# Altium PCB lab1_sokolov_usb_i2c.PcbDoc
Units mm, origin at the board's own origin, x right, y up, seen from the top; angles counter-clockwise.
Board outline 54.9 x 19.9 mm, 4 copper layers (Top Layer, Signal Layer 1, Signal Layer 2, Bottom Layer), stack 1.522 mm thick; 44 components, 30 nets, 163 pads, 4 vias.
Unrouted connection lines stored in the file: 99.
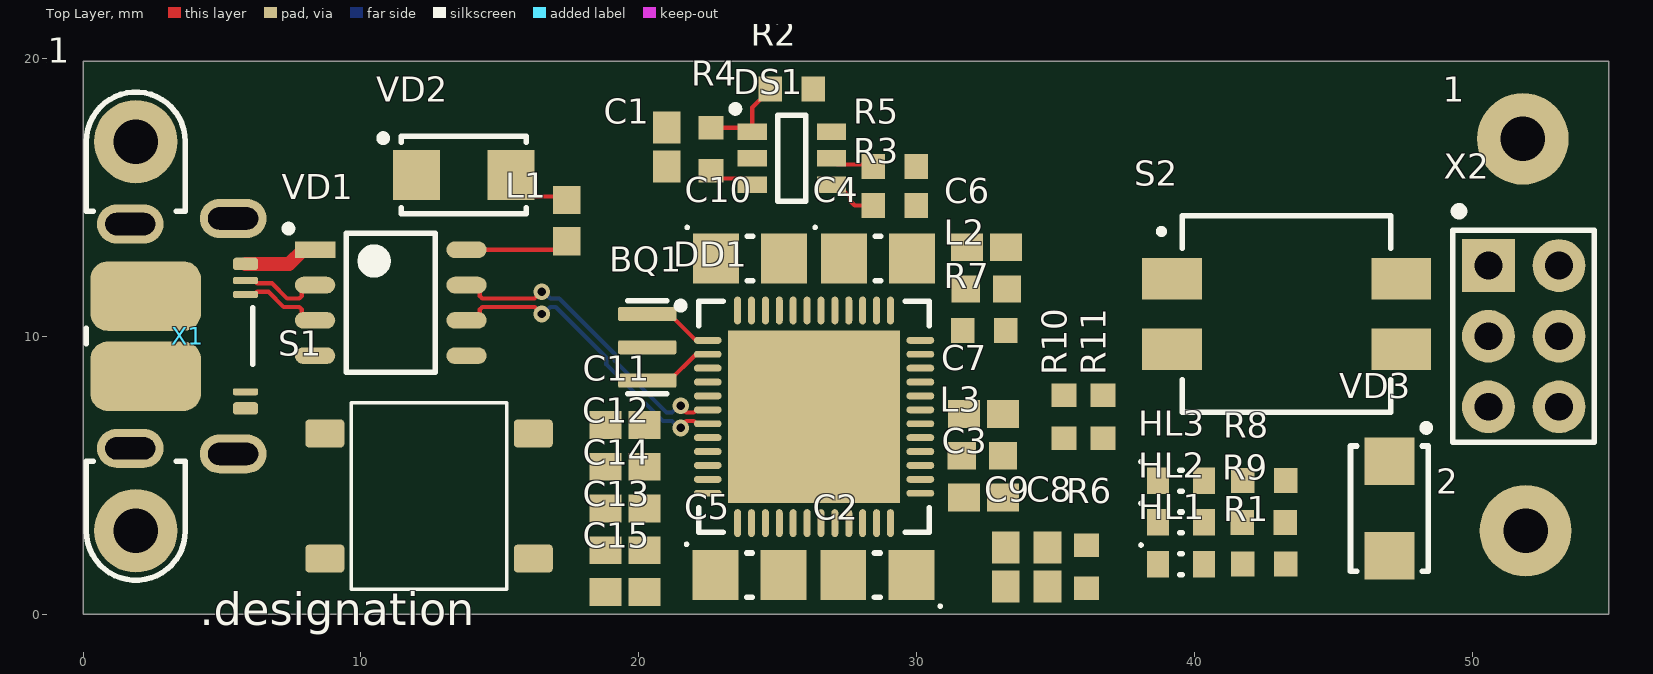
[diagram p0: Top Layer view]
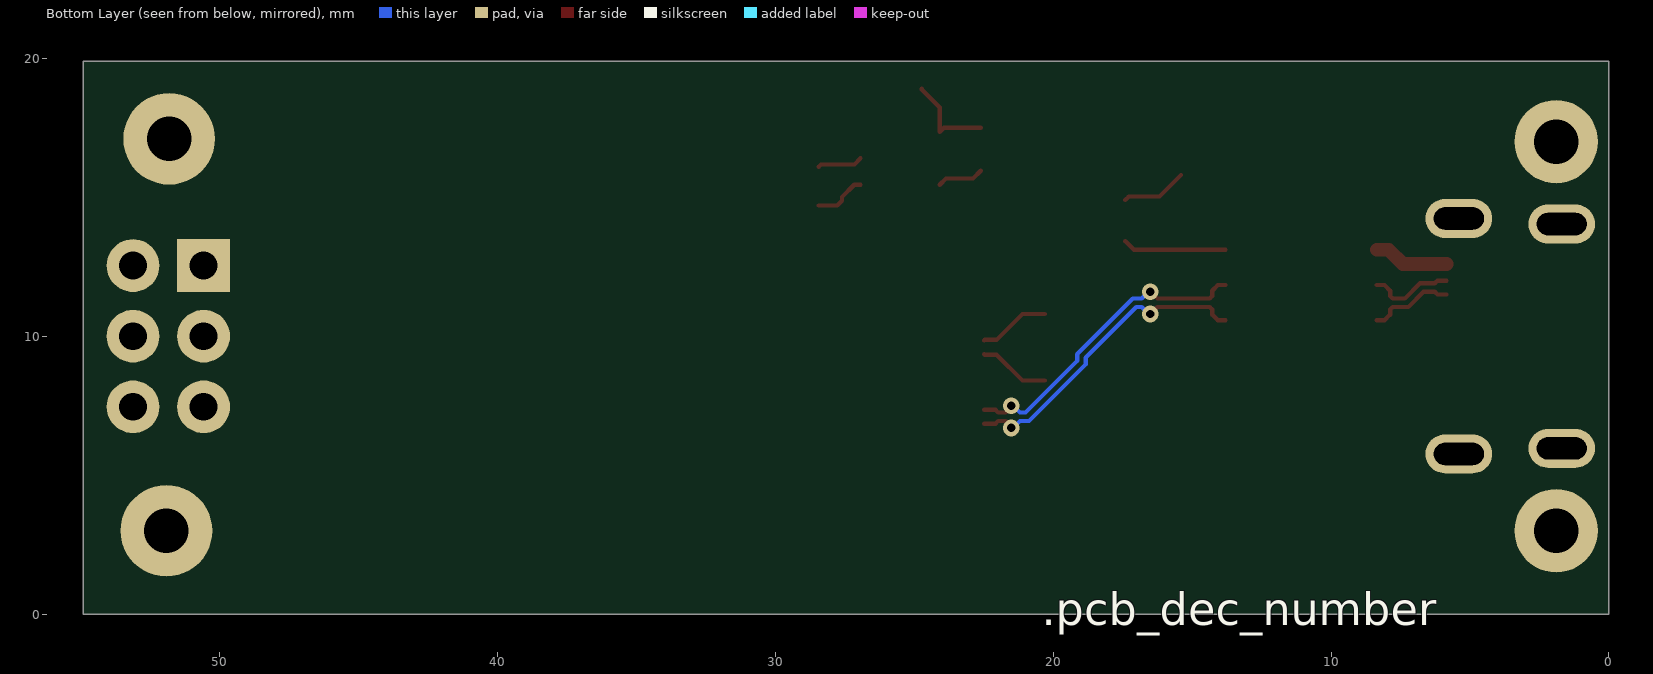
[diagram p1: Bottom Layer view, seen from below]

## Layer stack, top to bottom
Top Solder: solder mask 0.0102, Solder Resist, Dk 3.5
Top Layer: signal copper 0.018
Prepreg 1: prepreg 0.125, FR4 HiTg170, Dk 5.07
Signal Layer 1: signal copper 0.018
Core 1: core 1.2, FR4, Dk 4.6
Signal Layer 2: signal copper 0.018
Prepreg 2: prepreg 0.125, FR4 HiTg170, Dk 5.07
Bottom Layer: signal copper 0.018
Bottom Solder: solder mask 0.0102, Solder Resist, Dk 3.5

## Board outline
0,0 54.9,0 54.9,19.9 0,19.9

## Design rules (kind name [scope] priority, off if disabled: settings)
AcuteAngle min_acute_angle [OnCopper] p1: minimum=3.50000000000000E+0001 checktracksonly=FALSE // Минимальный угол между примитивами топологии
BoardOutlineClearance board_outline_clearance_std [NOT (OnLayer('Bottom Overlay') OR OnLayer('Top Overlay'))] p1: gap=0.25 ignorepadtopadclearanceinfootprint=FALSE except(0: Arc-SplitContinuation Track-SplitContinuation SMDPad-SplitContinuation THPad-SplitContinuation Via-SplitContinuation Fill-SplitContinuation Poly-SplitContinuation Region-SplitContinuation Text-SplitContinuation) // Отступ элементов топологии от края фрезеруемой печатной платы
Clearance clearance_outer_18um_std [OnTopLayer OR OnBottomLayer] p1: gap=0.125 ignorepadtopadclearanceinfootprint=TRUE except(0.2: Arc-Fill Arc-Poly Track-Fill Track-Poly SMDPad-SMDPad SMDPad-Fill SMDPad-Poly THPad-Fill THPad-Poly Via-Fill Via-Poly Fill-Fill Fill-Poly Poly-Poly Poly-Region Poly-Text; 0.25: Arc-Hole Track-Hole SMDPad-Hole THPad-Hole Via-Hole Fill-Hole Poly-Hole Region-Hole Text-Hole) // Зазоры на внешних слоях
Clearance clearance_inner_18um_std [NOT (OnTopLayer Or OnBottomLayer)] p2: gap=0.125 ignorepadtopadclearanceinfootprint=FALSE except(0.2: Arc-Fill Arc-Poly Track-Fill Track-Poly SMDPad-SMDPad SMDPad-Fill SMDPad-Poly THPad-Fill THPad-Poly Via-Fill Via-Poly Fill-Fill Fill-Poly Poly-Poly Poly-Region Poly-Text; 0.25: Arc-Hole Track-Hole SMDPad-Hole THPad-Hole Via-Hole Fill-Hole Poly-Hole Region-Hole Text-Hole) // Зазоры на внутренних слоях
ComponentClearance [All] p1: gap=0 collisioncheckmode=3 verticalgap=0 showdistances=FALSE
DiffPairsRouting "Schematic Differential Pairs Routing_3" [InNet('D_N')] p1: maxlimit=0.254 minlimit=0.15 mostfreqgap=0.254 toplayer_maxgap=0.15 toplayer_prefgap=0.15 toplayer_minwidth=0.155 toplayer_maxwidth=0.155 toplayer_prefwidth=0.155 bottomlayer_maxgap=0.15 bottomlayer_prefgap=0.15 bottomlayer_minwidth=0.155 bottomlayer_maxwidth=0.155 bottomlayer_prefwidth=0.155 impedanceprofiledriven=TRUE impedanceprofileid={1B1F1868-2FFB-4D51-908A-913D90CA9AFC} impedanceprofilevalue=95.000000 maxuncoupledlength=12.7
DiffPairsRouting "Schematic Differential Pairs Routing_2" [InNet('D_P')] p2: maxlimit=0.254 minlimit=0.15 mostfreqgap=0.254 toplayer_maxgap=0.15 toplayer_prefgap=0.15 toplayer_minwidth=0.155 toplayer_maxwidth=0.155 toplayer_prefwidth=0.155 bottomlayer_maxgap=0.15 bottomlayer_prefgap=0.15 bottomlayer_minwidth=0.155 bottomlayer_maxwidth=0.155 bottomlayer_prefwidth=0.155 impedanceprofiledriven=TRUE impedanceprofileid={1B1F1868-2FFB-4D51-908A-913D90CA9AFC} impedanceprofilevalue=95.000000 maxuncoupledlength=12.7
DiffPairsRouting "Schematic Differential Pairs Routing_1" [InNet('USB_D_N')] p3: maxlimit=0.254 minlimit=0.15 mostfreqgap=0.254 toplayer_maxgap=0.15 toplayer_prefgap=0.15 toplayer_minwidth=0.155 toplayer_maxwidth=0.155 toplayer_prefwidth=0.155 bottomlayer_maxgap=0.15 bottomlayer_prefgap=0.15 bottomlayer_minwidth=0.155 bottomlayer_maxwidth=0.155 bottomlayer_prefwidth=0.155 impedanceprofiledriven=TRUE impedanceprofileid={1B1F1868-2FFB-4D51-908A-913D90CA9AFC} impedanceprofilevalue=95.000000 maxuncoupledlength=12.7
DiffPairsRouting "Schematic Differential Pairs Routing" [InNet('USB_D_P')] p4: maxlimit=0.254 minlimit=0.15 mostfreqgap=0.254 toplayer_maxgap=0.15 toplayer_prefgap=0.15 toplayer_minwidth=0.155 toplayer_maxwidth=0.155 toplayer_prefwidth=0.155 bottomlayer_maxgap=0.15 bottomlayer_prefgap=0.15 bottomlayer_minwidth=0.155 bottomlayer_maxwidth=0.155 bottomlayer_prefwidth=0.155 impedanceprofiledriven=TRUE impedanceprofileid={1B1F1868-2FFB-4D51-908A-913D90CA9AFC} impedanceprofilevalue=95.000000 maxuncoupledlength=12.7
DiffPairsRouting diff_pairs_routing [All] p5: maxlimit=0.254 minlimit=0.127 mostfreqgap=0.254 toplayer_maxgap=0.127 toplayer_prefgap=0.127 toplayer_minwidth=0.143 toplayer_maxwidth=0.143 toplayer_prefwidth=0.143 midlayer1_minwidth=0.381 midlayer1_maxwidth=0.381 midlayer1_prefwidth=0.381 midlayer2_minwidth=0.381 midlayer2_maxwidth=0.381 midlayer2_prefwidth=0.381 bottomlayer_maxgap=0.127 bottomlayer_prefgap=0.127 bottomlayer_minwidth=0.143 bottomlayer_maxwidth=0.143 bottomlayer_prefwidth=0.143 impedanceprofiledriven=TRUE impedanceprofileid={FD46899E-B5A2-4EF5-A302-5D2DB6A51F35} maxuncoupledlength=12.7 // Правила трассировки дифференциальных пар
HoleSize min_hole_size_std [IsPad] p1: absolutevalues=TRUE maxlimit=5.9 minlimit=0.6 maxpercent=80.000 minpercent=20.000 // Диаметр межслойного переходного отверстия
HoleSize min_hole_size_via_std [IsVia] p2: absolutevalues=TRUE maxlimit=5.9 minlimit=0.3 maxpercent=80.000 minpercent=20.000 // Минимальный диаметр монтажного отверстия
HoleToHoleClearance hole_to_hole_clearance_std [All] p1: gap=0.2 allowstackedmicrovias=FALSE // Минимальное расстояние между краями двух отверстий
MinimumAnnularRing min_via_ar_std [All] p1: minimumring=0.15 // Поясок площадки переходного отверстия (Annular ring VIA)
MinimumAnnularRing min_pad_ar_std [All] p2: minimumring=0.2 // Поясок монтажной контактной площадки (Annular ring PAD)
MinimumSolderMaskSliver min_solder_mask_bridge_std [All] p1: minsoldermaskwidth=0.15 // Мнимальная ширина масочного мостика
PlaneClearance plane_clearance_18um_std [All] p1: clearance=0.2 // Отступ полигона (для слоя plane) от элементов топологии
PlaneConnect [All] p1: planeconnectstyle=Relief reliefexpansion=0.5 reliefentries=4 reliefconductorwidth=0.2 reliefairgap=0.2
PolygonConnect poly_connect_to_pad<=0.3 [(AsMM(PadXSize_AllLayers)<=0.301) or (AsMM(PadYSize_AllLayers)<=0.301)] p1: thpad.connectstyle=Relief thpad.reliefconductorwidth=0.2 thpad.reliefentries=4 thpad.polygonreliefangle="90 Angle" thpad.airgapwidth=0.2 smdpad.connectstyle=Relief smdpad.reliefconductorwidth=0.2 smdpad.reliefentries=4 smdpad.polygonreliefangle="90 Angle" smdpad.airgapwidth=0.2 via.connectstyle=Direct via.reliefconductorwidth=0.254 via.reliefentries=4 via.polygonreliefangle="90 Angle" via.airgapwidth=0.254 // Правила подключения полигонов для падов от 0,3мм и меньше
PolygonConnect poly_connect_to_pad<=0.4 [(AsMM(PadXSize_AllLayers)<=0.401) or (AsMM(PadYSize_AllLayers)<=0.401)] p2: thpad.connectstyle=Relief thpad.reliefconductorwidth=0.26 thpad.reliefentries=4 thpad.polygonreliefangle="90 Angle" thpad.airgapwidth=0.2 smdpad.connectstyle=Relief smdpad.reliefconductorwidth=0.26 smdpad.reliefentries=4 smdpad.polygonreliefangle="90 Angle" smdpad.airgapwidth=0.2 via.connectstyle=Direct via.reliefconductorwidth=0.254 via.reliefentries=4 via.polygonreliefangle="90 Angle" via.airgapwidth=0.254 // Правила подключения полигонов для падов от 0,4 и меньше
PolygonConnect poly_connect_to_pad<=0.6 [(AsMM(PadXSize_AllLayers)<=0.601) or (AsMM(PadYSize_AllLayers)<=0.601)] p3: thpad.connectstyle=Relief thpad.reliefconductorwidth=0.33 thpad.reliefentries=4 thpad.polygonreliefangle="90 Angle" thpad.airgapwidth=0.2 smdpad.connectstyle=Relief smdpad.reliefconductorwidth=0.33 smdpad.reliefentries=4 smdpad.polygonreliefangle="90 Angle" smdpad.airgapwidth=0.2 via.connectstyle=Direct via.reliefconductorwidth=0.254 via.reliefentries=4 via.polygonreliefangle="90 Angle" via.airgapwidth=0.254 // Правила подключения полигонов для падов от 0,6мм и меньше
PolygonConnect poly_connect_to_pad<=0.7 [(AsMM(PadXSize_AllLayers)<=0.701) or (AsMM(PadYSize_AllLayers)<=0.701)] p4: thpad.connectstyle=Relief thpad.reliefconductorwidth=0.46 thpad.reliefentries=4 thpad.polygonreliefangle="90 Angle" thpad.airgapwidth=0.2 smdpad.connectstyle=Relief smdpad.reliefconductorwidth=0.46 smdpad.reliefentries=4 smdpad.polygonreliefangle="90 Angle" smdpad.airgapwidth=0.2 via.connectstyle=Direct via.reliefconductorwidth=0.254 via.reliefentries=4 via.polygonreliefangle="90 Angle" via.airgapwidth=0.254 // Правила подключения полигонов для падов от 0,7мм и меньше
PolygonConnect poly_connect_to_pad<=0.8 [(AsMM(PadXSize_AllLayers)<=0.8)or(AsMM(PadYSize_AllLayers)<=0.8)] p5: thpad.connectstyle=Relief thpad.reliefconductorwidth=0.53 thpad.reliefentries=4 thpad.polygonreliefangle="90 Angle" thpad.airgapwidth=0.3 smdpad.connectstyle=Relief smdpad.reliefconductorwidth=0.53 smdpad.reliefentries=4 smdpad.polygonreliefangle="90 Angle" smdpad.airgapwidth=0.2 via.connectstyle=Direct via.reliefconductorwidth=0.254 via.reliefentries=4 via.polygonreliefangle="90 Angle" via.airgapwidth=0.254 // Правила подключения полигонов для падов от 0,8мм и меньше
PolygonConnect poly_connect_to_pad<=1 [(AsMM(PadXSize_AllLayers)<=1.01)or(AsMM(PadYSize_AllLayers)<=1.01)] p6: thpad.connectstyle=Relief thpad.reliefconductorwidth=0.6 thpad.reliefentries=4 thpad.polygonreliefangle="90 Angle" thpad.airgapwidth=0.3 smdpad.connectstyle=Relief smdpad.reliefconductorwidth=0.6 smdpad.reliefentries=4 smdpad.polygonreliefangle="90 Angle" smdpad.airgapwidth=0.2 via.connectstyle=Direct via.reliefconductorwidth=0.254 via.reliefentries=4 via.polygonreliefangle="90 Angle" via.airgapwidth=0.254 // Правила подключения полигонов для падов от 1мм и меньше
PolygonConnect poly_connect_to_pad<=1.3 [(AsMM(PadXSize_AllLayers)<=1.31)or(AsMM(PadYSize_AllLayers)<=1.31)] p7: thpad.connectstyle=Relief thpad.reliefconductorwidth=0.66 thpad.reliefentries=4 thpad.polygonreliefangle="90 Angle" thpad.airgapwidth=0.3 smdpad.connectstyle=Relief smdpad.reliefconductorwidth=0.86 smdpad.reliefentries=4 smdpad.polygonreliefangle="90 Angle" smdpad.airgapwidth=0.2 via.connectstyle=Direct via.reliefconductorwidth=0.254 via.reliefentries=4 via.polygonreliefangle="90 Angle" via.airgapwidth=0.254 // Правила подключения полигонов для падов от 1,3мм и меньше
PolygonConnect poly_connect_to_pad<=1.6 [(AsMM(PadXSize_AllLayers)<=1.61)or(AsMM(PadYSize_AllLayers)<=1.61)] p8: thpad.connectstyle=Relief thpad.reliefconductorwidth=0.8 thpad.reliefentries=4 thpad.polygonreliefangle="90 Angle" thpad.airgapwidth=0.3 smdpad.connectstyle=Relief smdpad.reliefconductorwidth=1 smdpad.reliefentries=4 smdpad.polygonreliefangle="90 Angle" smdpad.airgapwidth=0.2 via.connectstyle=Direct via.reliefconductorwidth=0.254 via.reliefentries=4 via.polygonreliefangle="90 Angle" via.airgapwidth=0.254 // Правила подключения полигонов для падов от 1,6мм и меньше
PolygonConnect poly_connect_to_pad<=1.8 [(AsMM(PadXSize_AllLayers)<=1.8)or(AsMM(PadYSize_AllLayers)<=1.8)] p9: thpad.connectstyle=Relief thpad.reliefconductorwidth=1 thpad.reliefentries=4 thpad.polygonreliefangle="90 Angle" thpad.airgapwidth=0.3 smdpad.connectstyle=Relief smdpad.reliefconductorwidth=1.2 smdpad.reliefentries=4 smdpad.polygonreliefangle="90 Angle" smdpad.airgapwidth=0.2 via.connectstyle=Direct via.reliefconductorwidth=0.254 via.reliefentries=4 via.polygonreliefangle="90 Angle" via.airgapwidth=0.254 // Правила подключения полигонов для падов от 1,8мм и меньше
PolygonConnect poly_connect_to_pad<=2 [(AsMM(PadXSize_AllLayers)<=2.01)or(AsMM(PadYSize_AllLayers)<=2.01)] p10: thpad.connectstyle=Relief thpad.reliefconductorwidth=1.1 thpad.reliefentries=4 thpad.polygonreliefangle="90 Angle" thpad.airgapwidth=0.3 smdpad.connectstyle=Relief smdpad.reliefconductorwidth=1.4 smdpad.reliefentries=4 smdpad.polygonreliefangle="90 Angle" smdpad.airgapwidth=0.2 via.connectstyle=Direct via.reliefconductorwidth=0.254 via.reliefentries=4 via.polygonreliefangle="90 Angle" via.airgapwidth=0.254 // Правила подключения полигонов для падов от 2мм и меньше
PolygonConnect poly_connect_to_pad<=2.3 [(AsMM(PadXSize_AllLayers)<=2.31)or(AsMM(PadYSize_AllLayers)<=2.31)] p11: thpad.connectstyle=Relief thpad.reliefconductorwidth=1.2 thpad.reliefentries=4 thpad.polygonreliefangle="90 Angle" thpad.airgapwidth=0.3 smdpad.connectstyle=Relief smdpad.reliefconductorwidth=1.4 smdpad.reliefentries=4 smdpad.polygonreliefangle="90 Angle" smdpad.airgapwidth=0.2 via.connectstyle=Direct via.reliefconductorwidth=0.254 via.reliefentries=4 via.polygonreliefangle="90 Angle" via.airgapwidth=0.254 // Правила подключения полигонов для падов от 2,3мм и меньше
PolygonConnect poly_connect_to_pad<=2.5 [(AsMM(PadXSize_AllLayers)<=2.51)or(AsMM(PadYSize_AllLayers)<=2.51)] p12: thpad.connectstyle=Relief thpad.reliefconductorwidth=1.2 thpad.reliefentries=4 thpad.polygonreliefangle="90 Angle" thpad.airgapwidth=0.3 smdpad.connectstyle=Relief smdpad.reliefconductorwidth=1.4 smdpad.reliefentries=4 smdpad.polygonreliefangle="90 Angle" smdpad.airgapwidth=0.2 via.connectstyle=Direct via.reliefconductorwidth=0.254 via.reliefentries=4 via.polygonreliefangle="90 Angle" via.airgapwidth=0.254 // Правила подключения полигонов для падов от 2,5мм и меньше
PolygonConnect poly_connect_to_pad<=2.7 [(AsMM(PadXSize_AllLayers)<=2.71)or(AsMM(PadYSize_AllLayers)<=2.71)] p13: thpad.connectstyle=Relief thpad.reliefconductorwidth=1.4 thpad.reliefentries=4 thpad.polygonreliefangle="90 Angle" thpad.airgapwidth=0.3 smdpad.connectstyle=Relief smdpad.reliefconductorwidth=1.6 smdpad.reliefentries=4 smdpad.polygonreliefangle="90 Angle" smdpad.airgapwidth=0.2 via.connectstyle=Direct via.reliefconductorwidth=0.254 via.reliefentries=4 via.polygonreliefangle="90 Angle" via.airgapwidth=0.254 // Правила подключения полигонов для падов от 2,7мм и меньше
PolygonConnect poly_connect_to_pad<=3 [(AsMM(PadXSize_AllLayers)<=3.01)or(AsMM(PadYSize_AllLayers)<=3.01)] p14: thpad.connectstyle=Relief thpad.reliefconductorwidth=1.6 thpad.reliefentries=4 thpad.polygonreliefangle="90 Angle" thpad.airgapwidth=0.3 smdpad.connectstyle=Relief smdpad.reliefconductorwidth=1.8 smdpad.reliefentries=4 smdpad.polygonreliefangle="90 Angle" smdpad.airgapwidth=0.2 via.connectstyle=Direct via.reliefconductorwidth=0.254 via.reliefentries=4 via.polygonreliefangle="90 Angle" via.airgapwidth=0.254 // Правила подключения полигонов для падов от 3мм и меньше
PolygonConnect poly_connect_to_pad<=7 [(AsMM(PadXSize_AllLayers)<7.01)or(AsMM(PadYSize_AllLayers)<=7.01)] p15: thpad.connectstyle=Relief thpad.reliefconductorwidth=2 thpad.reliefentries=4 thpad.polygonreliefangle="90 Angle" thpad.airgapwidth=0.4 smdpad.connectstyle=Relief smdpad.reliefconductorwidth=2 smdpad.reliefentries=4 smdpad.polygonreliefangle="90 Angle" smdpad.airgapwidth=0.3 via.connectstyle=Direct via.reliefconductorwidth=0.254 via.reliefentries=4 via.polygonreliefangle="90 Angle" via.airgapwidth=0.254 // Правила подключения полигонов для падов от 7мм и меньше
PolygonConnect poly_connect_to_pad [All] p16: thpad.connectstyle=Relief thpad.reliefconductorwidth=0.25 thpad.reliefentries=4 thpad.polygonreliefangle="90 Angle" thpad.airgapwidth=0.2 smdpad.connectstyle=Relief smdpad.reliefconductorwidth=0.25 smdpad.reliefentries=4 smdpad.polygonreliefangle="90 Angle" smdpad.airgapwidth=0.2 via.connectstyle=Direct via.reliefconductorwidth=0.25 via.reliefentries=4 via.polygonreliefangle="90 Angle" via.airgapwidth=0.2 // Правила подключения полигонов общие
RoutingCorners [All] p1 off: cornerstyle=45-Degree minsetback=2.5 maxsetback=2.5
RoutingVias [All] p1: holewidth=0.3 width=0.6 viastyle="Through Hole" minholewidth=0.3 minwidth=0.6 maxholewidth=5.9 maxwidth=6.4
SilkToSilkClearance silk_to_silk_clearance_std [All] p1 off: silktosilkclearance=0.15 // Отступ текста шелкографии от других примитивов шелкографии
SilkToSolderMaskClearance silk_to_solder_mask_clearance_std [IsPad] p1 off: minsilkscreentomaskgap=0.15 clearancetoexposedcopper=FALSE // Минимальное расстояние между элементами шелкографии и вскрытой медью
SolderMaskExpansion solder_mask_expansion_std [All] p1: expansion=0.05 // Припуск паяльной масски
UnRoutedNet [All] p1: checkbadconnections=TRUE
Width width_18um_std [All] p1: maxlimit=10 minlimit=0.125 preferedwidth=0.15 checkconnectedcopper=TRUE // Ширина проводников (общая)
19 further rules are at their usual default settings.

## Classes and differential pairs
differential pair class USB_NETS_CLASS: D USB_D
differential pair USB_D: +USB_D_P -USB_D_N
differential pair D: +D_P -D_N

## Components (designator, comment, footprint, x,y, rotation, side; value= is the part's Value field where it differs from the comment)
1 "MOUNTING_HOLE" HOLE_1,6X3,3 51.8,17.1 r90 top
2 "MOUNTING_HOLE" HOLE_1,6X3,3 51.9,3 r90 top
BQ1 "CSTCE12M0G52A-R0" CSTCE-3-320X130X70 20.3,9.6 r180 top
C1 "0,1 мк" C0603 21,16.8 r270 top
C2 "4,7 мк" C1206POLAR 28.575,1.4 r180 top
C3 "0,1 мк" C0603 32.4,4.2 r180 top
C4 "4,7 мк" C1206POLAR 28.6,12.8 r0 top
C5 "4,7 мк" C1206POLAR 23.975,1.4 r0 top
C6 "0,1 мк" C0603 32.5,13.2 r0 top
C7 "0,1 мк" C0603 32.4,7.2 r180 top
C8 "0,1 мк" C0603 34.7,1.7 r270 top
C9 "0,1 мк" C0603 33.2,1.7 r270 top
C10 "4,7 мк" C1206POLAR 24,12.8 r0 top
C11 "0,1 мк" C0603 19.5,6.8 r180 top
C12 "0,1 мк" C0603 19.5,5.3 r180 top
C13 "0,1 мк" C0603 19.5,2.3 r180 top
C14 "0,1 мк" C0603 19.5,3.8 r180 top
C15 "0,1 мк" C0603 19.5,0.8 r180 top
DD1 "FT232HQ" QFN-48 26.3,7.1 r0 top
DS1 "93LC56BT-I/OT" SOT23-6 25.5,16.4 r0 top
HL1 "TLMB1100-GS08" HL0603 39.5,1.8 r0 top
HL2 "TLMB1100-GS08" HL0603 39.5,3.3 r0 top
HL3 "TLMB1100-GS08" HL0603 39.5,4.8 r0 top
L1 "BLM18KG221SH1D" BLM-2-0603 17.4,14.16 r270 top
L2 "BLM18KG221SH1D" BLM-2-0603 32.5,11.7 r0 top
L3 "BLM18KG221SH1D" BLM-2-0603 32.36,5.7 r180 top
R1 "220" R0603 42.5,1.8 r180 top
R2 "10 к" R0603 25.5,18.9 r180 top
R3 "10 к" R0603 29.2,14.7 r180 top
R4 "2 к" R0603 22.6,16.725 r270 top
R5 "10 к" R0603 29.2,16.1 r180 top
R6 "12 К" R0603 36.1,1.7 r90 top
R7 "10 к" R0603 32.425,10.2 r180 top
R8 "10 к" R0603 42.5,4.8 r0 top
R9 "10 к" R0603 42.475,3.3 r0 top
R10 "10 к" R0603 35.3,7.1 r270 top
R11 "10 к" R0603 36.7,7.1 r270 top
S1 "KLS7-TS6604-5.0-180-B" KLS7-TS6604_500 12.45,4.25 r180 top
S2 "SDA02H1SBD" DIP-SWITCH-02-706X930X545 43.3,10.8 r0 top
VD1 "USB6B1" SO-8 11.075,11.205 r0 top
VD2 "SL13-E3/5AT" DO-214AC 13.7,15.8 r0 top
VD3 "SL13-E3/5AT" DO-214AC 47,3.8 r270 top
X1 "2108877-1" 2108877-1 2.15,10 r90 top
X2 "DS1021-2*3SF11" DS1021-2X3SF11 51.83,10 r270 top

## Footprints (in the part's own frame and the unit in brackets; to place one, negate y for a bottom-side part, rotate by r counter-clockwise, add the part's x,y. Pads: shape width x height; smd on the part's side, far side on the other; paste and mask are expansions set on the pad)
2108877-1 [mm]
  rrect50% 0.45x0.9 smd: 1(2.6,-3.696) 5(-2.6,-3.696)
  rrect50% 0.25x0.9 smd: 2(2,-3.696) 3(1.5,-3.696) 4(-2,-3.696)
  round 3 hole 1.6: TP1(-7,0.25) TP1(7,0.25)
  oval 1.4x2.4 hole 0.8 slot 1.8 at 90 deg mask+0.102: TP1(-4.235,-3.25) TP1(-4.035,0.45) TP1(4.035,0.45) TP1(4.235,-3.25)
  rrect50% 2.5x3.98 smd: TP1(-1.441,-0.104) TP1(1.441,-0.104)
  silkscreen extent -8.78,-3.95 8.78,2.03, body extent -8.9,-3.95 8.9,3.95, height 3.39
BLM-2-0603 [mm] "Chip Inductor, 2-Leads, Body 1,60x0,80mm, IPC Medium Density"
  rect 1.02x0.98 smd: 1(-0.74,0) 2(0.74,0)
  body extent -0.8,-0.37 0.8,0.38, height 0.8
C0603 [mm] "Chip Capacitor, 2-Leads, Body 1,60x0,80mm, IPC Medium Density"
  rect 1.15x1 smd: 1(-0.7,0) 2(0.7,0)
  body extent -0.8,-0.4 0.8,0.4, height 0.8
C1206POLAR [mm] "Chip Capacitor, 2-Leads, Body 3,20x1,60mm, IPC Medium Density"
  rect 1.65x1.8 smd: 1(-1.225,0) 2(1.225,0)
  silkscreen extent -2.31,-0.8 0.1,1.16, body extent -1.73,-0.8 1.73,0.8, height 1.65
CSTCE-3-320X130X70 [mm]
  rrect25% 2.1x0.5 smd paste-0.025 mask+0.1: 1(0,1.2) 2(0,0) 3(0,-1.2)
  silkscreen extent -0.7,-1.67 0.7,1.68, body extent -0.7,-1.68 0.7,1.67, height 0.75
DIP-SWITCH-02-706X930X545 [mm]
  rect 2.15x1.5 smd: 1(-4.125,-1.27) 2(4.125,-1.27) 3(-4.125,1.27) 4(4.125,1.27)
  silkscreen extent -4.6,-3.53 3.74,3.53, body extent -4.65,-3.53 4.65,3.53, height 5.44
DO-214AC [mm] "Molded Diode, 2-Leads, Body 4,25x2,67mm, IPC Medium Density"
  rect 1.7x1.8 smd: 1(-1.7,0) 2(1.7,0)
  silkscreen extent -3.02,-1.4 2.25,1.45, body extent -2.7,-1.81 2.7,1.81, height 2.43
DS1021-2X3SF11 [mm]
  rect 1.9x1.9 hole 1: 1(-2.54,-1.27)
  round 1.9 hole 1: 2(-2.54,1.27) 3(0,-1.27)
  round 1.9 hole 1 mask+0.102: 4(0,1.27) 5(2.54,-1.27) 6(2.54,1.27)
  silkscreen extent -4.5,-2.55 3.81,2.54, body extent -3.81,-2.54 3.81,2.54, height 8.59
HL0603 [mm] "Chip Diode, 2-Leads, Body 1,60x0,80mm, IPC Medium Density"
  rect 0.8x0.95 smd: 1(-0.825,0) 2(0.825,0)
  silkscreen extent -1.49,-0.38 0.05,0.74, body extent -0.81,-0.4 0.81,0.4, height 0.6
HOLE_1,6X3,3 [mm]
  round 3.3 hole 1.6: 1(0,0)
KLS7-TS6604_500 [mm] "6.5x6.5mm SMD tact switch 5mm stem"
  rrect25% 1.4x1 smd: 1(-3.75,2.25) 1(3.75,2.25) 2(-3.75,-2.25) 2(3.75,-2.25)
  silkscreen extent -2.79,-3.35 2.79,3.35, body extent -4,-3.25 4,3.25, height 4.3
QFN-48 [mm] "QFN, 48-Leads, Body 8,00x8,00mm, Pitch 0,50mm, Thermal Pad 6,20x6,20mm, IPC Medium Density"
  rect 6.2x6.2 smd: 0(0,0)
  oval 1x0.25 smd: 1(-3.825,2.75) 2(-3.825,2.25) 3(-3.825,1.75) 4(-3.825,1.25) 5(-3.825,0.75) 6(-3.825,0.25) 7(-3.825,-0.25) 8(-3.825,-0.75) 9(-3.825,-1.25) 10(-3.825,-1.75) 11(-3.825,-2.25) 12(-3.825,-2.75) 25(3.825,-2.75) 26(3.825,-2.25) 27(3.825,-1.75) 28(3.825,-1.25) 29(3.825,-0.75) 30(3.825,-0.25) 31(3.825,0.25) 32(3.825,0.75) 33(3.825,1.25) 34(3.825,1.75) 35(3.825,2.25) 36(3.825,2.75)
  oval 0.25x1 smd: 13(-2.75,-3.825) 14(-2.25,-3.825) 15(-1.75,-3.825) 16(-1.25,-3.825) 17(-0.75,-3.825) 18(-0.25,-3.825) 19(0.25,-3.825) 20(0.75,-3.825) 21(1.25,-3.825) 22(1.75,-3.825) 23(2.25,-3.825) 24(2.75,-3.825) 37(2.75,3.825) 38(2.25,3.825) 39(1.75,3.825) 40(1.25,3.825) 41(0.75,3.825) 42(0.25,3.825) 43(-0.25,3.825) 44(-0.75,3.825) 45(-1.25,3.825) 46(-1.75,3.825) 47(-2.25,3.825) 48(-2.75,3.825)
  silkscreen extent -4.92,-4.15 4.15,4.15, body extent -4,-4 4,4, height 0.85
R0603 [mm] "Chip Resistor, 2-Leads, Body 1,60x0,80mm, IPC Medium Density"
  rect 0.85x0.9 smd: 1(-0.775,0) 2(0.775,0)
  body extent -0.8,-0.4 0.8,0.4, height 0.45
SO-8 [mm] "SOIC, 8-Leads, Body 4,90x3,90mm, Pitch 1,27mm, IPC Medium Density"
  rect 1.45x0.6 smd: 1(-2.725,1.905)
  oval 1.45x0.6 smd: 2(-2.725,0.635) 3(-2.725,-0.635) 4(-2.725,-1.905) 5(2.725,-1.905) 6(2.725,-0.635) 7(2.725,0.635) 8(2.725,1.905)
  silkscreen extent -3.81,-2.5 1.6,2.79, body extent -3.06,-2.47 3.06,2.48, height 1.75
SOT23-6 [mm] "SOT23, 6-Leads, Body 2,90x2,70mm, Pitch 0,95mm, IPC Medium Density"
  rect 1.05x0.6 smd: 1(-1.425,0.95) 2(-1.425,0) 3(-1.425,-0.95) 4(1.425,-0.95) 5(1.425,0) 6(1.425,0.95)
  silkscreen extent -2.16,-1.55 0.5,1.9, body extent -0.9,-1.55 0.9,1.55, height 1.45

## Part data
BQ1: library part q0001, "=Описание", HelpURL=https://www.murata.com/en-us/products/productdetail?partno=CSTCE12M0G52A-R0, id=q0001, Корпус=3,2x1,3x0,7, Наименование=CSTCE12M0G52A-R0, Описание="Кварцевый резонатор 12 МГц", Производитель="Murata Manufacturing Co., Ltd.", Фамилия=Самарин, Частота="12 МГц"
C1 C3 C6 C7 C8 C9 C11 C12 C13 C14 C15: library part c0005, "=Описание", HelpURL=https://www.yageo.com/upload/media/product/products/datasheet/mlcc/UPY-GPHC_X7R_6.3V-to-50V_20.pdf, id=c0005, Корпус=0603, Наименование=CC0603JRX7R9BB104, Номинал="0,1 мк", Номинальное напряжение="50 В", Описание="Конденсатор чип 0603 0,1 мкФ 50 В ±5 %", Отклонение="±5 %", Производитель=Yageo, Рабочие температуры="от -55 °С до +125 °С", Фамилия=Ларионов
C2 C4 C5 C10: library part c0012, "=Описание", HelpURL=https://ru.mouser.com/datasheet/2/427/tr3-1763391.pdf, id=c0012, Корпус=1206, Наименование=TR3A475K010C1000, Номинал="4,7 мк", Номинальное напряжение="10 В", Описание="Конденсатор чип 1206 4,7 мкФ 10 В ±10 % полярный", Отклонение="±10 %", Производитель="Vishay Intertechnology, Inc.", Рабочие температуры="от -55 °С до +85 °С", Фамилия=Соколов
DD1: library part dd0008, "=Описание", HelpURL=https://www.ftdichip.com/Products/ICs/FT232H.htm, id=dd0008, Корпус=QFN-48, Наименование=FT232HQ, Описание="Преобразователь USB-I2C", Производитель="FTDI Ltd.", Фамилия=Соколов
DS1: library part ds0001, "=Описание", HelpURL=https://www.microchip.com/wwwproducts/en/93LC56B, id=ds0001, Корпус=SOT23-6, Наименование=93LC56BT-I/OT, Описание="EEPROM 2 Кб 3 линии", Производитель="Microchip Technology Inc.", Фамилия=Соколов
HL1 HL2 HL3: library part hl0006, "=Описание", HelpURL=https://www.vishay.com/leds/list/product-83173/, id=hl0006, Корпус=0603, Наименование=TLMB1100-GS08, Номинальная длина волны="466 нм", Номинальная сила света="5 мкд", Номинальное падение напряжения="3,9 В", Номинальный прямой ток="30 мА", Описание="Светодиод чип 0603 синий", Примечание="Not for new design", Производитель="Vishay Intertechnology, Inc.", Рабочие температуры="от -40 °С до +100 °С", Рассеиваемая мощность="90 мВт", Фамилия=Ларионов, Цвет=Blue
L1 L2 L3: library part l0001, "=Описание", HelpURL=https://www.murata.com/en-global/products/productdetail.aspx?partno=BLM18KG221SH1%23, id=l0001, Корпус=0603, Наименование=BLM18KG221SH1D, Описание="Ферритовая бусина 220 Ом ±25 %", Отклонение, 100 Мгц="±25 %", Производитель="Murata Manufacturing Co., Ltd.", Рабочие температуры="от -55 °С до +125 °С", Сопротивление, 100 МГц="220 Ом", Сопротивление при постоянном токе="0,05 Ом", Фамилия=Ларионов
R1: library part r0008, "=Описание", HelpURL=https://www.yageo.com/upload/media/product/productsearch/datasheet/rchip/PYu-RC_Group_51_RoHS_L_11.pdf, id=r0008, Корпус=0603, Наименование=RC0603FR-07220RL, Номинал=220, Номинальное напряжение="75 В", Номинальный ток="1 А", Описание="Резистор чип 0603 220 Ом ±1 % 0,1 Вт", Отклонение="±1 %", Производитель=Yageo, Рабочие температуры="от -55 °С до +155 °С", Фамилия=Ларионов
R2 R3 R5: library part r0011, "=Описание", HelpURL=https://www.yageo.com/upload/media/product/productsearch/datasheet/rchip/PYu-RC_Group_51_RoHS_L_11.pdf, id=r0011, Корпус=0603, Наименование=RC0603FR-0710KL, Номинал="10 к", Номинальное напряжение="75 В", Номинальный ток="1 А", Описание="Резистор чип 0603 10 кОм ±1 % 0,1 Вт", Отклонение="±1 %", Производитель=Yageo, Рабочие температуры="от -55 °С до +155 °С", Фамилия=Самарин
R4: library part r0013, "=Описание", HelpURL=https://ru.mouser.com/datasheet/2/219/RS73-1759534.pdf, id=r0013, Корпус=0603, Наименование=RS73G1JTTD2001F, Номинал="2 к", Номинальное напряжение="100 В", Номинальный ток="1 А", Описание="Резистор чип 0603 2 кОм ±1 % 0,1 Вт", Отклонение="±1 %", Производитель="KOA Speer", Рабочие температуры="от -55 °С до +155 °С", Фамилия=Соколов
R6: library part r0014, "=Описание", HelpURL=https://ru.mouser.com/datasheet/2/447/PYu-AC_51_RoHS_L_7-1714230.pdf, id=r0014, Корпус=0603, Наименование=AC0603FR-1012KL, Номинал="12 К", Номинальное напряжение="75 В", Номинальный ток="1 А", Описание="Резистор чип 0603 12 кОм ±1 % 0,1 Вт", Отклонение="±1 %", Производитель=Yageo, Рабочие температуры="от -55 °С до +155 °С", Фамилия=Соколов
R7 R8 R9 R10 R11: library part r0012, "=Описание", HelpURL=https://www.yageo.com/upload/media/product/productsearch/datasheet/rchip/PYu-RC_Group_51_RoHS_L_11.pdf, id=r0012, Корпус=0603, Наименование=RC0603FR-0710KL, Номинал="10 к", Номинальное напряжение="75 В", Номинальный ток="1 А", Описание="Резистор чип 0603 10 кОм ±1 % 0,1 Вт", Отклонение="±1 %", Производитель=Yageo, Рабочие температуры="от -55 °С до +155 °С", Фамилия=Самарин
S2: library part sw0001, "=Описание", HelpURL=https://www.ckswitches.com/products/switches/product-details/DIP/SDA/SDA02H1SBD/, id=sw0001, Количество контактов=2, Корпус=7,06х9,30х5,45, Наименование=SDA02H1SBD, Описание="2-х позиционный движковый переключатель", Производитель=C&K, Промывка=Разрешена, Рабочие температуры="от -40 °С до +85 °С", Сопротивление контакта="50 мОм", Ток нагрузки="100 мА @ 5 В", Фамилия=Козлов
VD1: library part vd0005, "=Описание", HelpURL=https://www.st.com/content/st_com/en/products/protection-devices/esd-protection/usb-port-protection/usb6b1.html, id=vd0005, Корпус=SO-8, Наименование=USB6B1, Описание="Диодная сборка для подавления помех, от 6 В", Производитель=STMicroelectronics, Фамилия=Ларионов
VD2 VD3: library part vd0001, "=Описание", HelpURL=https://www.vishay.com/product?docid=88740, id=vd0001, Импульсное обратное напряжение="30 В", Корпус=DO-214AC, Макс допустимый средний прямой ток="1,5 А", Наименование=SL13-E3/5AT, Описание="Диод Шоттки 30 В 1,5 А", Пиковое прямое напряжение="0,445 В", Производитель="Vishay Intertechnology, Inc.", Рабочие температуры="от -55 °С до +125 °С", Фамилия=Ларионов
X1: library part 2108877-1_micro_usb-b, Contact_1=VBUS, Contact_2=D-, Contact_3=D+, Contact_4=ID, Contact_5=GND, Наименование=2108877-1
X2: library part x0003, "=Описание", Contact_1=+5V, Contact_2=Contact_2, Contact_3=SCL, Contact_4=SDA, Contact_5=Contact_5, Contact_6=GND, HelpURL=http://www.connfly.com/productshow.aspx?id=118, id=x0003, Наименование=DS1021-2*3SF11, Описание="PLS 3x2 pin 2,54 мм вилка прямой", Производитель="Connfly Electronic Co. LTD", Фамилия=Самарин
1 2: id=fstn0011, Диаметр отверстия="1,6 мм", Наименование="Отверстие 1,6x3,3", Описание="Отверстие под М1,5", Параметры металлизации="3,3 мм"
S1: HelpURL=http://www.klsele.com/admin/product_upload/20120515130956KLS7-TS6604.pdf, id=sw0003, Капустин=Черемный, Количество контактов=4, Корпус=6х6х3,5, Наименование=KLS7-TS6604-5.0-180-B, Описание="Тактовая кнопка поверхностного монтажа", Производитель=KLS, Промывка="Не указано (запрещена)", Сопротивление контакта="50 мОм", Температура окружающей среды (корпуса), макс#="+70 °C", Температура окружающей среды (корпуса), мин#="-20 °C", Ток нагрузки="50 мА @ 12 В"

## Via types
v1: diameter 0.6, hole 0.3, Top Layer to Bottom Layer, tented both sides, 4 vias

## Nets (pads, with @x,y where several pads share a name; then routed paths per layer and width w, separated by ;. In a path a pad name is that pad's centre, name@x,y a point inside that pad or via, vN(x,y) a via of type N, cw(c..) or ccw(c..) an arc to the next point about the centre after c; other vN are vias at no path point)
+1.8V: C12.2 DD1.38
+3.3V: C1.2 C10.1 C11.2 C13.2 C14.2 C15.2 DD1.12 DD1.24 DD1.39 DD1.46 DS1.6 L2.1 L3.1 R2.1 R3.1 R5.1 R7.1
+5V: C2.1 C3.2 DD1.40 HL2.1 HL2.2 HL3.1 HL3.2 R1.1 R8.2 R9.2 R10.2 R11.2 VD2.1 VD3.2
CLK: DD1.44 DS1.4 R3.2 | length 1.9
  Top Layer w0.155: DS1.4 27.15,15.45 27.592,15.008 27.592,14.876 27.767,14.7 R3.2
CN_5V_IN: VD1.1 X1.1 | length 2.7
  Top Layer w0.5: X1.1 7.415,12.6 7.925,13.11 VD1.1
CS: DD1.45 DS1.5 R5.2 | length 1.6
  Top Layer w0.155: DS1.5 27.147,16.178 28.347,16.178 R5.2
D_N: VD1.2 X1.2 | length 3.1
  Top Layer w0.155: X1.2 6.171,12 6.268,11.903 6.799,11.903 7.344,11.358 7.783,11.358 7.874,11.448 7.874,11.634 8.079,11.84 VD1.2
D_P: VD1.3 X1.3 | length 3.1
  Top Layer w0.155: X1.3 6.171,11.5 6.268,11.597 6.673,11.597 7.218,11.052 7.783,11.052 7.874,10.962 7.874,10.776 8.079,10.57 VD1.3
DATA: DD1.43 DS1.3 R4.2 | length 1.7
  Top Layer w0.155: R4.2 22.878,15.672 23.853,15.672 DS1.3
GND: 1.1 2.1 BQ1.2 C1.1 C2.2 C3.1 C4.2 C5.2 C6.1 C7.1 C8.1 C9.1 C10.2 C11.1 C12.1 C13.1 C14.1 C15.1 DD1.4 DD1.9 DD1.41 DD1.42 DS1.2 HL1.1 HL1.2 R1.2 R6.2 S1.1 VD1.4 VD1.5 X1.5 X1.TP1 X2.6
NetBQ1_1: BQ1.1 DD1.2 | length 2.6
  Top Layer w0.15: BQ1.1 21.1,8.4 22.031,9.331 22.456,9.331 DD1.2
NetBQ1_3: BQ1.3 DD1.1 | length 2.6
  Top Layer w0.15: BQ1.3 21.1,10.8 22.031,9.869 22.456,9.869 DD1.1
NetC8_2: C8.2 DD1.34 R7.2 S1.2
NetC9_2: C9.2 DD1.37
NetDD1_5: DD1.5 R6.1
NetDD1_10: DD1.10 DD1.11 DD1.22 DD1.23 DD1.35 DD1.36 DD1.47 DD1.48
NetDS1_1: DS1.1 R2.2 R4.1 | length 3.4
  Top Layer w0.155: R4.1 23.925,17.5 DS1.1 24.075,18.225 24.725,18.875 R2.2
NetL1_1: L1.1 VD2.2 | length 2.4
  Top Layer w0.15: VD2.2@16.172,15.028 L1.1@17.272,15.028
  Top Layer w0.155: VD2.2 VD2.2@16.172,15.028 ; L1.1@17.272,15.028 L1.1
NetL1_2: L1.2 VD1.8 | length 3.7
  Top Layer w0.155: VD1.8 17.09,13.11 L1.2
NetR10_1: R10.1 S2.1
NetR11_1: R11.1 S2.3
NetVD3_1: VD3.1 X2.1
RXLED: DD1.21 R8.1
SCL: DD1.13 S2.2 X2.3
SDA: DD1.14 S2.4 X2.4
TXLED: DD1.25 R9.1
USB_D_N: DD1.6 VD1.7 | length 11.3
  Top Layer w0.155: VD1.7 14.071,11.84 14.276,11.634 14.276,11.448 14.367,11.358 16.242,11.358 16.484,11.6 v1(16.5,11.6) ; v1(21.5,7.5) 21.5,7.453 21.7,7.253 21.826,7.253 21.977,7.253 22.074,7.35 DD1.6
  Bottom Layer w0.155: v1(16.5,11.6) 16.566,11.6 16.813,11.353 17.132,11.353 19.134,9.351 19.134,9.113 20.994,7.253 21.187,7.253 21.434,7.5 v1(21.5,7.5)
USB_D_P: DD1.7 VD1.6 | length 11.3
  Top Layer w0.155: VD1.6 14.071,10.57 14.276,10.776 14.276,10.962 14.367,11.052 16.247,11.052 v1(16.5,10.8) ; v1(21.5,6.7) 21.5,6.747 21.7,6.947 21.977,6.947 22.074,6.85 DD1.7
  Bottom Layer w0.155: v1(16.5,10.8) 16.566,10.8 16.813,11.047 17.006,11.047 18.829,9.224 18.829,8.986 20.868,6.947 21.187,6.947 21.434,6.7 v1(21.5,6.7)
VPHY: C5.1 C7.2 DD1.3 L3.2
VPLL: C4.1 C6.2 DD1.8 L2.2
pads on no net: DD1.0 DD1.15 DD1.16 DD1.17 DD1.18 DD1.19 DD1.20 DD1.26 DD1.27 DD1.28 DD1.29 DD1.30 DD1.31 DD1.32 DD1.33 X1.4 X2.2 X2.5

## Silkscreen, mask and mechanical layers (free items; w line width, h text height)
Top Overlay:
  text ".designation" at 4.2,-0.8 h2
Bottom Overlay:
  text ".pcb_dec_number" at 20.4,-0.8 h2
Board:
  the board outline again, w0.1
Assembly Notes (Mech5):
  text "'.title'" at 0,-2.5 h2
  text "'.project'_'.pcb_dec_number'['.Pcb_File_Name_No_Path']" at 0,-5 h2